# EAGLE board BottleNosePrototype (EAGLE 6.2)
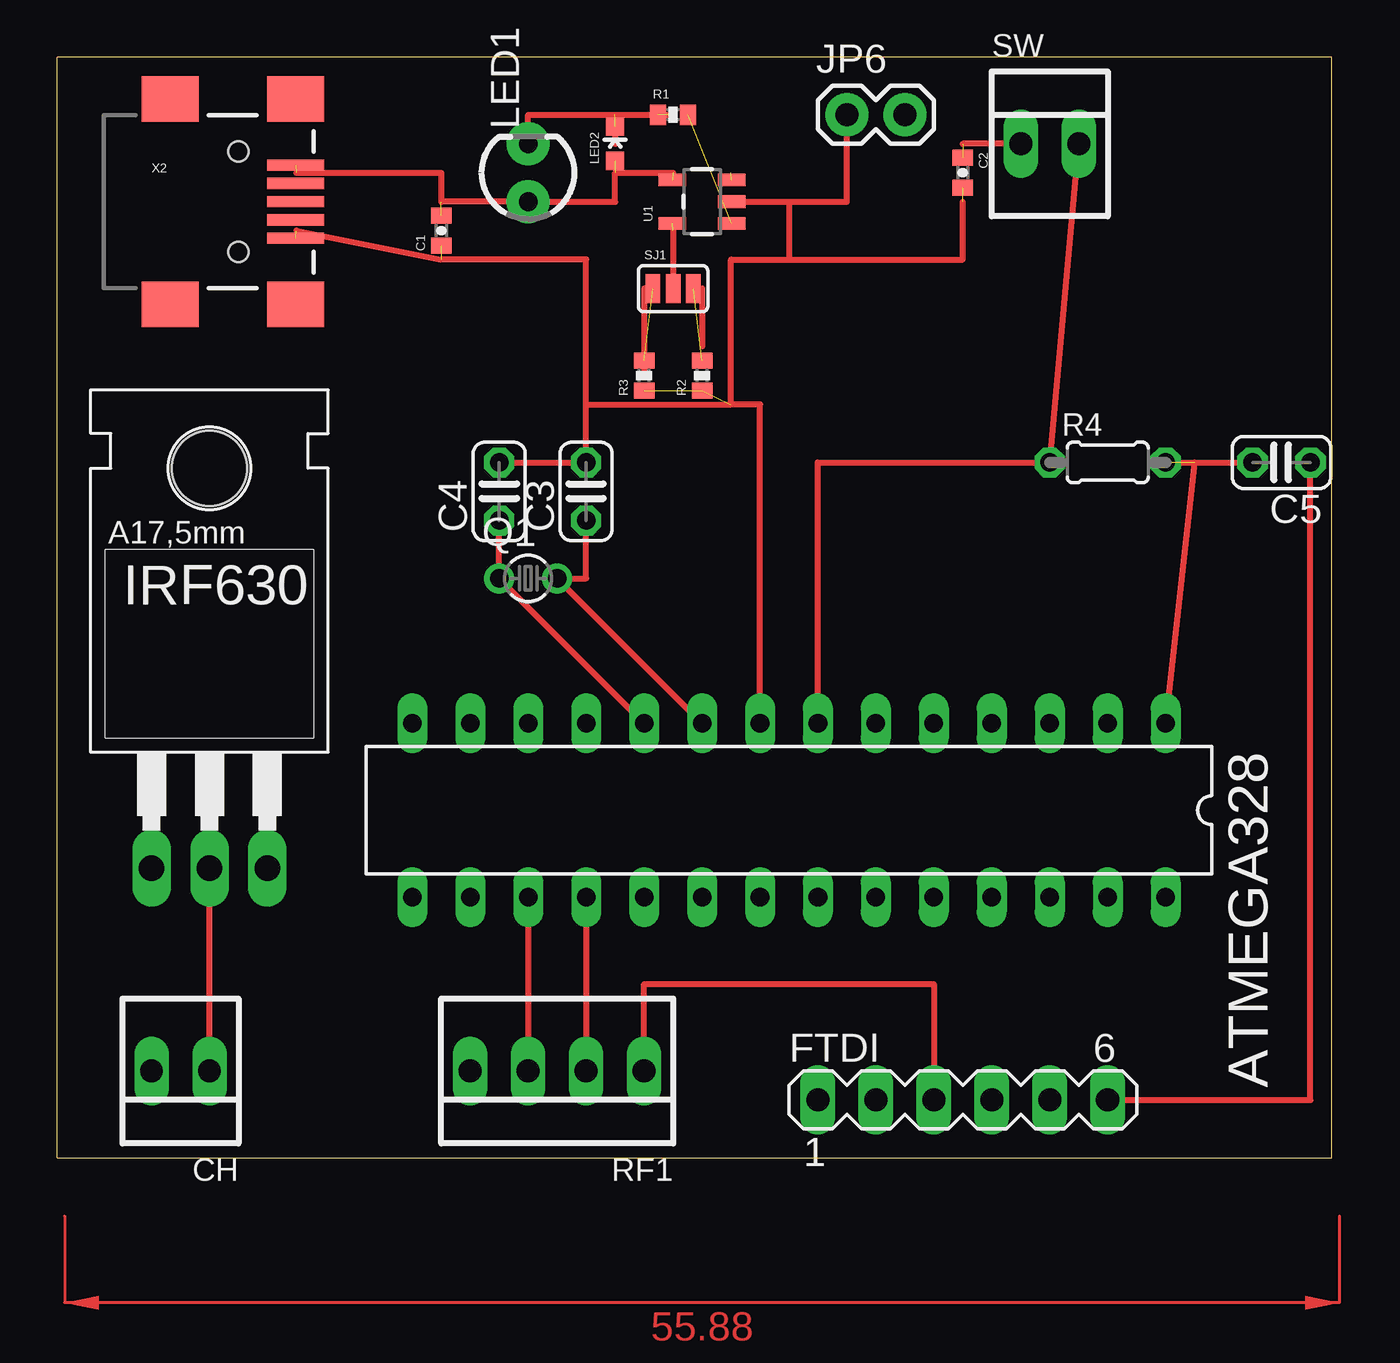
[diagram p0: board, top side]
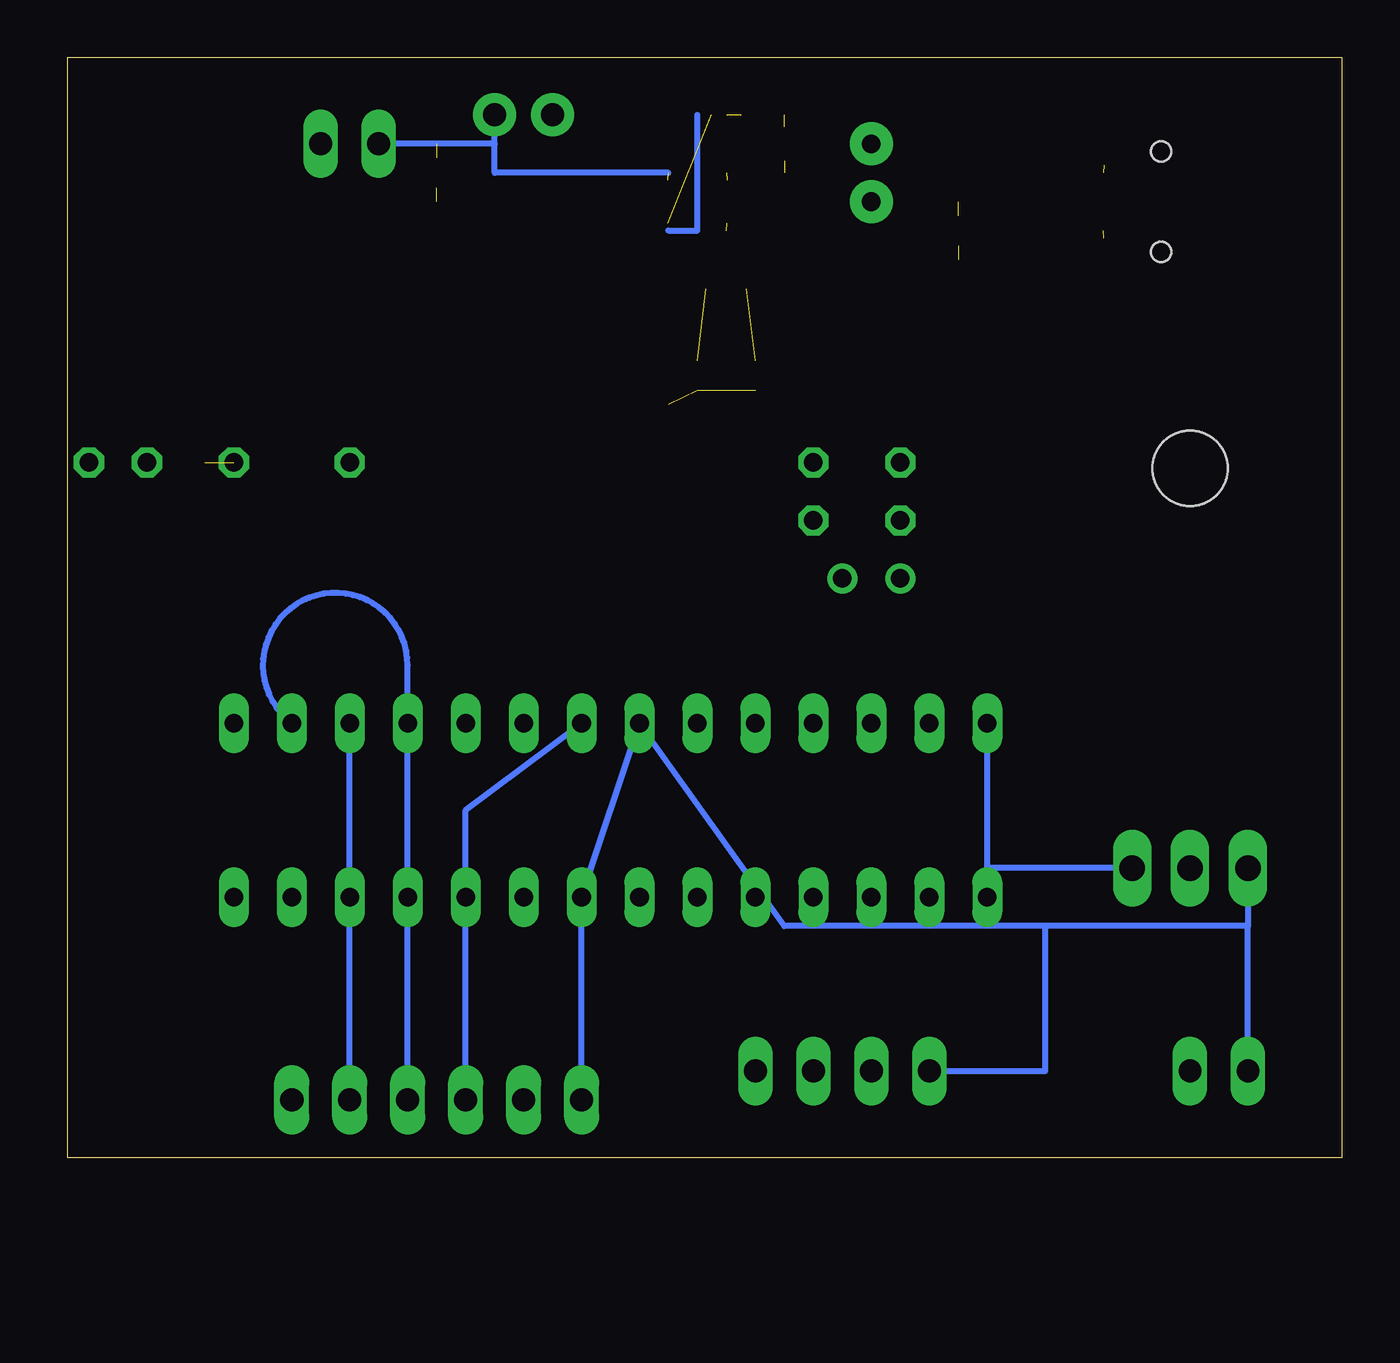
[diagram p1: board, bottom side, seen from below]

Size 55.88 x 48.25 mm. Coordinates in mm from the lower left corner, seen from the top.
Outline: 0,0 55.88,0 55.88,48.25 0,48.25 0,0
Copper layers (1*16): Top 0.035mm / dielectric 1.5mm / Bottom 0.035mm
Design rules: minimum track width 10mil, minimum drill 24mil, track to track 8mil, track to pad 8mil, pad to pad 8mil, via to via 8mil, smd to smd 8mil, copper to edge 40mil, drill to drill 8mil, minimum pad ring 10mil, minimum via ring 8mil, stop-mask expansion 4mil, vias tented up to drill 0mil, thermal gap 10mil

## Footprints (pad centres in the part's own frame; a part is rotated, then mirrored left to right if it is on the bottom)
DIL28-3 = drill 0.813 long: 1 -16.51,-3.81; 2 -13.97,-3.81; 3 -11.43,-3.81; 4 -8.89,-3.81; 5 -6.35,-3.81; 6 -3.81,-3.81; 7 -1.27,-3.81; 8 1.27,-3.81; 9 3.81,-3.81; 10 6.35,-3.81; 11 8.89,-3.81; 12 11.43,-3.81; 13 13.97,-3.81; 14 16.51,-3.81; 15 16.51,3.81; 16 13.97,3.81; 17 11.43,3.81; 18 8.89,3.81; 19 6.35,3.81; 20 3.81,3.81; 21 1.27,3.81; 22 -1.27,3.81; 23 -3.81,3.81; 24 -6.35,3.81; 25 -8.89,3.81; 26 -11.43,3.81; 27 -13.97,3.81; 28 -16.51,3.81
0402-CAP = smd 0.7 x 0.9: 1 -0.65,0; 2 0.65,0
C025-024X044 = drill 0.813 octagon: 1 -1.27,0; 2 1.27,0
22-23-2021 = drill 1 long: 1 -1.27,0; 2 1.27,0
MA06-1 = drill 1.016 long: 1 -6.35,0; 2 -3.81,0; 3 -1.27,0; 4 1.27,0; 5 3.81,0; 6 6.35,0
TO220 = drill 1.118 long: 1 -2.54,-6.35; 2 0,-6.35; 3 2.54,-6.35 | hole 3.302: 0,11.176
1X02 = drill 1.016 pad 1.88: 1 0,0; 2 2.54,0
LED3MM = drill 0.813 pad 1.88: A -1.27,0; K 1.27,0
LED-0603 = smd 0.8 x 0.8: A 0,-0.75; C 0,0.75
TC26V = drill 0.813: 1 -1.27,0; 2 1.27,0
0402-RES = smd 0.7 x 0.9: 1 -0.65,0; 2 0.65,0
0204/5 = drill 0.813 octagon: 1 -2.54,0; 2 2.54,0
22-23-2041 = drill 1 long: 1 -3.81,0; 2 -1.27,0; 3 1.27,0; 4 3.81,0
SJ_3 = smd 0.635 x 1.27: 1 -0.889,0; 2 0,0; 3 0.889,0
SOT23-5 = smd 0.55 x 1.2: 1 -0.95,-1.3; 2 0,-1.3; 3 0.95,-1.3; 4 0.95,1.3; 5 -0.95,1.3
USB-MINIB = smd 2.5 x 0.5: D+ 2.5,0; D- 2.5,0.8; GND 2.5,-1.6; ID 2.5,-0.8; VBUS 2.5,1.6 | smd 2.5 x 2: MTN1 -3,4.5; MTN2 2.5,4.5; MTN3 -3,-4.5; MTN4 2.5,-4.5 | hole 0.9: 0,2.2; 0,-2.2

## Placement (x,y rotation side)
ATMEGA328  MEGA8-P  [DIL28-3]  32.08,15.24 180 top
C1  4.7uF  [0402-CAP]  16.84,40.64 90 top
C2  4.7uF  [0402-CAP]  39.7,43.18 270 top
C3  22pF  [C025-024X044]  23.19,29.21 90 top
C4  22pF  [C025-024X044]  19.38,29.21 90 top
C5  0.1uF  [C025-024X044]  53.67,30.48 180 top
CH  [22-23-2021]  5.41,3.81 180 top
FTDI  FTDI  [MA06-1]  39.7,2.54 0 top
IRF630  [TO220]  6.68,19.05 0 top
JP6  M02  [1X02]  34.62,45.72 0 top
LED1  DNP  [LED3MM]  20.65,43.18 90 top
LED2  RED  [LED-0603]  24.46,44.45 0 top
Q1  16MHz  [TC26V]  20.65,25.4 0 top
R1  330  [0402-RES]  27,45.72 0 top
R2  2k  [0402-RES]  28.27,34.29 90 top
R3  10k  [0402-RES]  25.73,34.29 90 top
R4  10k  [0204/5]  46.05,30.48 0 top
RF1  [22-23-2041]  21.92,3.81 180 top
SJ1  SJ1  [SJ_3]  27,38.1 0 top
SW  [22-23-2021]  43.51,44.45 0 top
U1  MCP73831  [SOT23-5]  28.27,41.91 90 top
X2  USBSMD  [USB-MINIB]  7.95,41.91 0 top

## Library data of the parts
ATMEGA328 = atmel; OC_FARNELL: unknown; OC_NEWARK: unknown
C1 C2 JP6 LED1 LED2 R1-R3 SJ1 U1 X2 = SparkFun
C3-C5 = rcl
CH SW = con-molex; MF: MOLEX; MPN: 22-23-2021; OC_FARNELL: 1462926; OC_NEWARK: 25C3832
FTDI = con-lstb; OC_FARNELL: unknown; OC_NEWARK: unknown
IRF630 = transistor-fet
Q1 = crystal; OC_FARNELL: unknown; OC_NEWARK: unknown
R4 = resistor
RF1 = con-molex; MF: MOLEX; MPN: 22-23-2041; OC_FARNELL: 1462920; OC_NEWARK: 38C0355

## Nets
AVCC: ATMEGA328.20
GND: ATMEGA328.8 ATMEGA328.22 C1.1 C2.2 C3.2 C4.2 CH.2 FTDI.1 IRF630.1 JP6.1 R2.1 R3.1 RF1.4 U1.2 X2.GND
N$2: R1.2 U1.1
N$3: LED1.K LED2.C R1.1
N$4: R2.2 SJ1.3
N$5: ATMEGA328.7 FTDI.3 R4.1 RF1.1 SW.2
N$6: C2.1 JP6.2 SW.1 U1.3
N$7: R3.2 SJ1.1
N$8: ATMEGA328.9 C3.1 Q1.2
N$9: ATMEGA328.18 RF1.2
N$10: ATMEGA328.14 IRF630.3
N$11: CH.1 IRF630.2
N$12: ATMEGA328.10 C4.1 Q1.1
N$13: ATMEGA328.17 RF1.3
N$14: ATMEGA328.2 FTDI.4
N$15: ATMEGA328.3 FTDI.5
N$17: C5.1 FTDI.6
N$18: ATMEGA328.1 C5.2 R4.2
N$24: C1.2 LED1.A LED2.A U1.4 X2.VBUS
PROG: SJ1.2 U1.5

## Tracks (layer width: path | path; a pad name or v marks a point on that pad's centre or on a via)
GND  (5 unrouted)
  Top 0.254: C4.2 C3.2 23.19,33.02 | 23.19,33.02 29.54,33.02 | 29.54,33.02 29.54,39.37 32.08,39.37 | 32.08,39.37 39.7,39.37 39.7,41.91 | 23.19,33.02 23.19,39.37 16.84,39.37 10.49,40.64 | 32.08,41.91 U1.2 29.54,41.91 | 32.08,41.91 32.08,39.37 | ATMEGA328.8 30.81,33.02 29.54,33.02 | 32.08,41.91 34.62,41.91 JP6.1
  Bottom 0.254: IRF630.1 4.14,10.16 | 4.14,10.16 13.03,10.16 | 13.03,10.16 24.46,10.16 ATMEGA328.8 ATMEGA328.22 FTDI.1 | CH.2 4.14,10.16 | RF1.4 13.03,3.81 13.03,10.16
N$2  (1 unrouted)
N$3  (2 unrouted)
  Top 0.254: LED1.K 20.65,45.72 24.46,45.72 | 24.46,45.72 24.46,44.45 | 24.46,45.72 27,45.72
N$4  (1 unrouted)
N$5
  Top 0.254: SW.2 R4.1 33.35,30.48 ATMEGA328.7 | RF1.1 25.73,7.62 38.43,7.62 FTDI.3
  Bottom 0.254: FTDI.3 38.43,15.24 ATMEGA328.7
N$6  (2 unrouted)
  Top 0.254: SW.1 39.7,44.45
  Bottom 0.254: 29.54,43.18 37.16,43.18 37.16,44.45 | 37.16,44.45 JP6.2 | 37.16,44.45 SW.1
N$7  (1 unrouted)
N$8
  Top 0.254: ATMEGA328.9 Q1.2 23.19,25.4 C3.1
N$9
  Top 0.254: ATMEGA328.18 RF1.2
N$10
  Bottom 0.254: IRF630.3 15.57,12.7 ATMEGA328.14
N$11
  Top 0.254: CH.1 IRF630.2
N$12
  Top 0.254: ATMEGA328.10 Q1.1 C4.1
N$13
  Top 0.254: ATMEGA328.17 RF1.3
N$14
  Bottom 0.254: FTDI.4 40.97,21.59 arc-233 ATMEGA328.2
N$15
  Bottom 0.254: FTDI.5 ATMEGA328.3
N$16
  Top 0.254: 25.73,38.1 25.73,34.29
N$17
  Top 0.254: FTDI.6 54.94,2.54 C5.1
N$18  (1 unrouted)
  Top 0.254: ATMEGA328.1 49.86,30.48 | R4.2 C5.2
N$19
  Top 0.254: 28.27,38.1 28.27,35.56
N$23
  Bottom 0.254: 29.54,40.64 28.27,40.64 28.27,45.72
N$24  (4 unrouted)
  Top 0.254: 10.49,43.18 16.84,43.18 16.84,41.91 LED1.A 24.46,41.91 24.46,43.18 27,43.18
PROG  (1 unrouted)
  Top 0.254: 27,40.64 SJ1.2
(copper drawn outside any net)
  shapes: Top area x2